# Altium PCB PCB.PcbDoc
Units mm, origin at the board's own origin, x right, y up, seen from the top; angles counter-clockwise.
Board outline 39.5 x 58 mm, 2 copper layers (Top Layer, Bottom Layer); 27 components, 30 nets, 127 pads, 7 vias.
Unrouted connection lines stored in the file: 7.
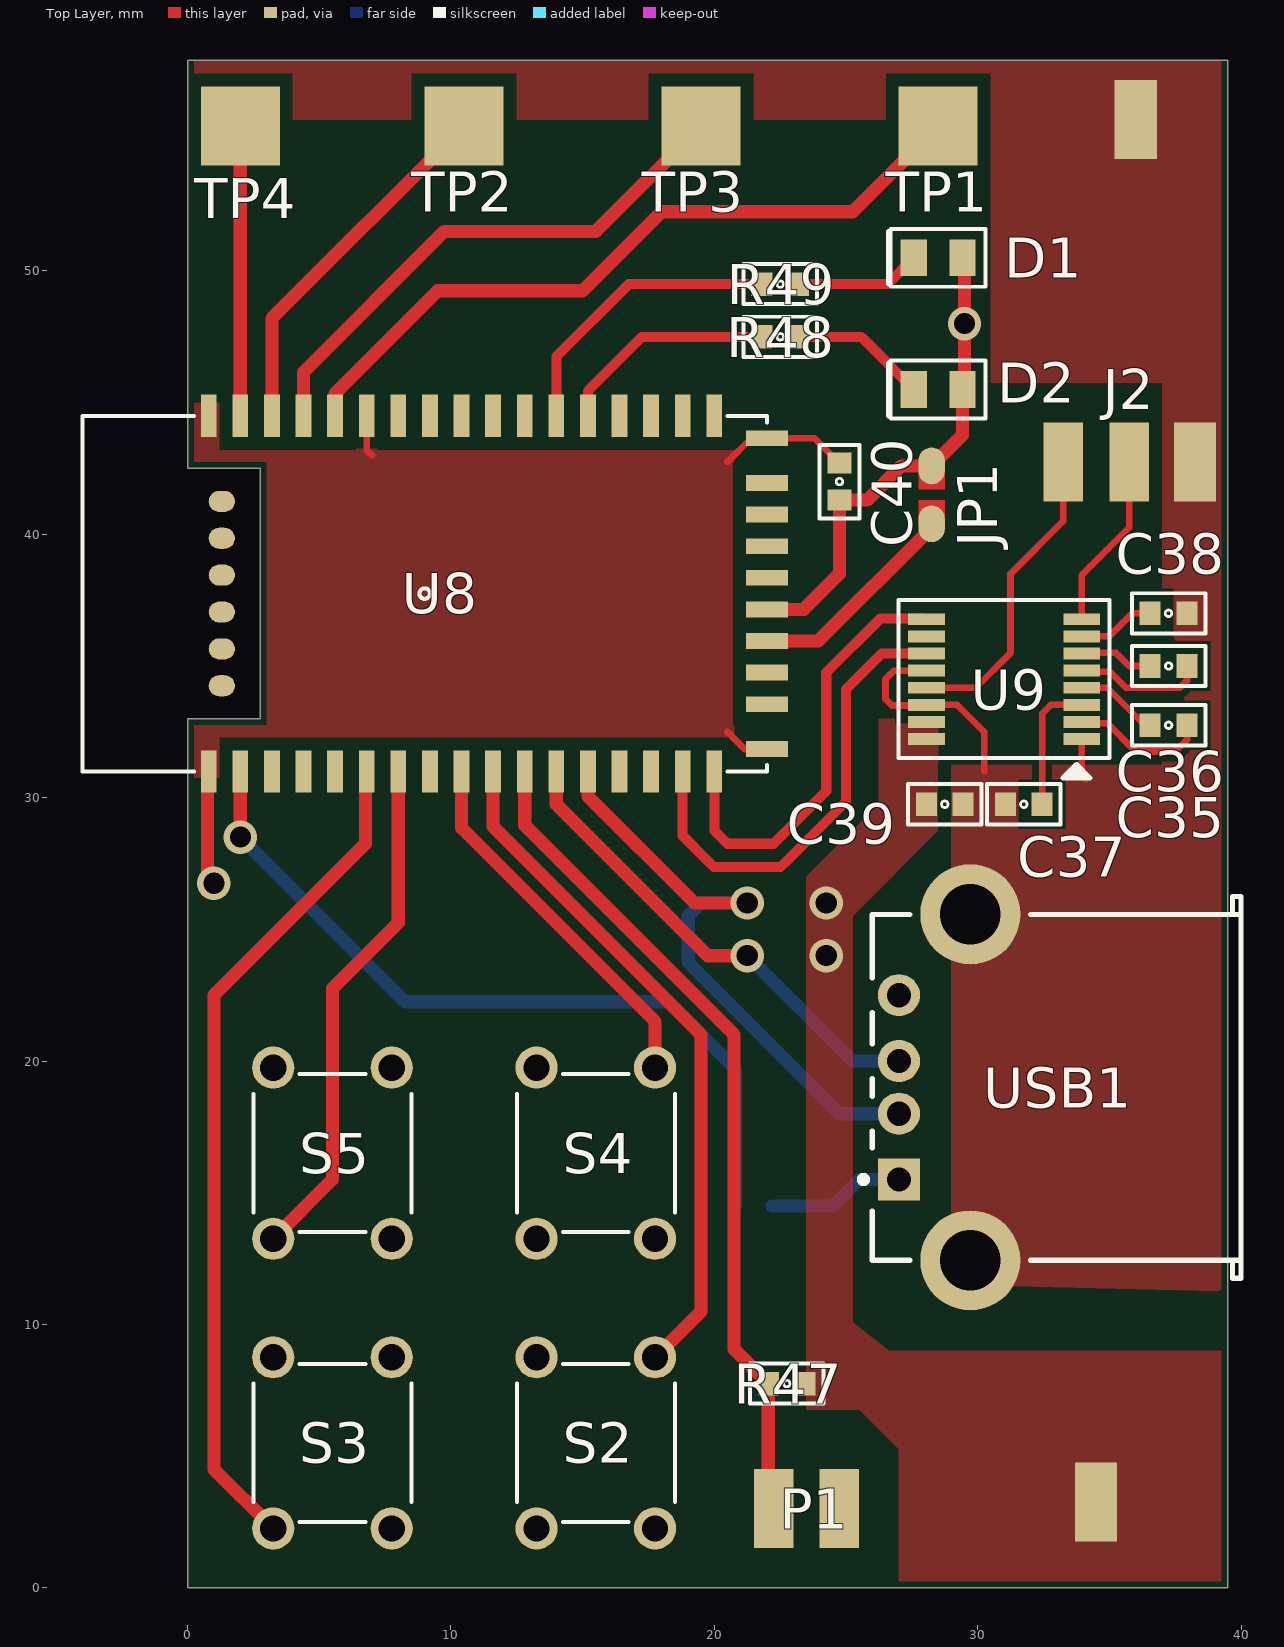
[diagram p0: Top Layer view]
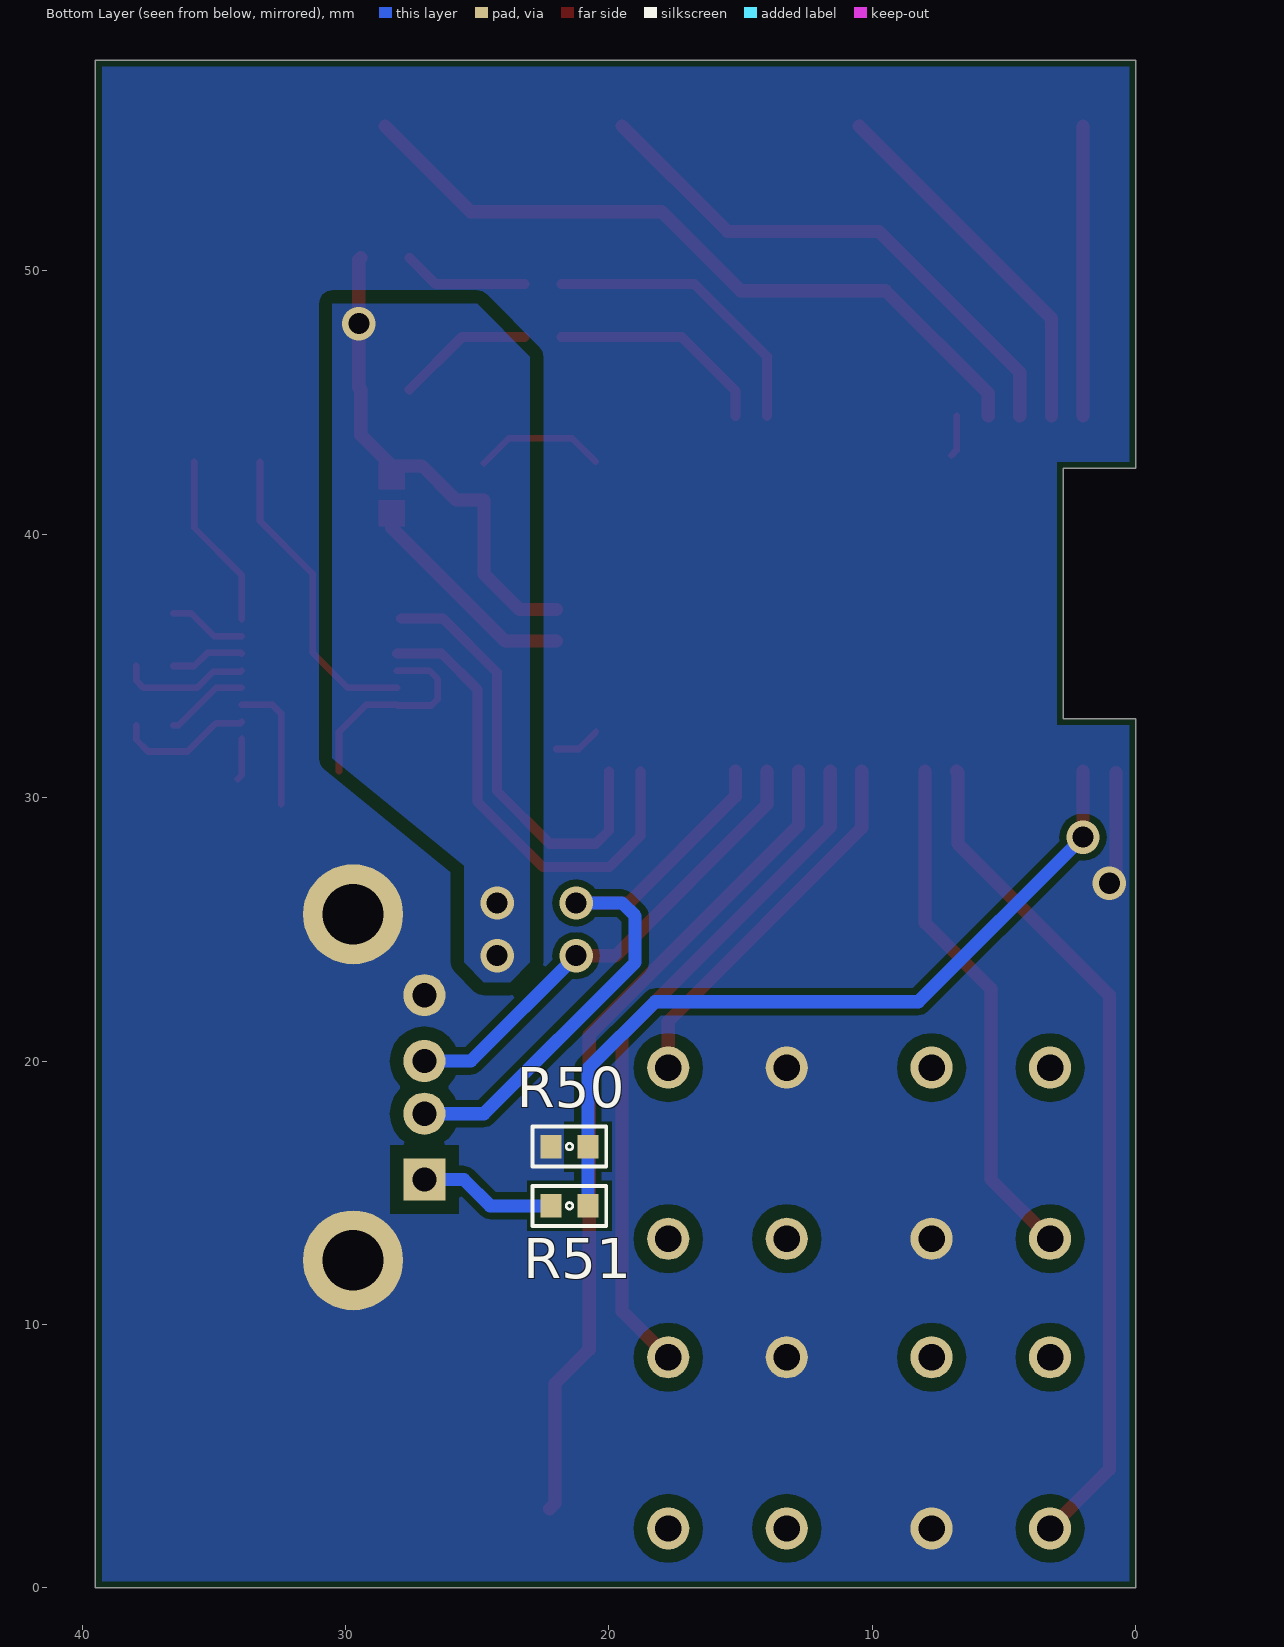
[diagram p1: Bottom Layer view, seen from below]

## Layer stack, top to bottom
Top Solder: solder mask 0.0102, Solder Resist, Dk 3.5
Top Layer: signal copper 0.0356
Dielectric 1: dielectric 0.32, FR-4, Dk 4.8
Bottom Layer: signal copper 0.0356
Bottom Solder: solder mask 0.0102, Solder Resist, Dk 3.5

## Board outline
0,0 0,33 2.75,33 2.75,42.5 0,42.5 0,58 39.5,58 39.5,0

## Design rules (kind name [scope] priority, off if disabled: settings)
Clearance [All] p1: gap=0.254 except(0.5: SMDPad-Poly THPad-Poly Poly-Poly)
DiffPairsRouting [All] p1: maxlimit=0.254 minlimit=0.254 mostfreqgap=0.254 toplayer_minwidth=0.381 toplayer_maxwidth=1 toplayer_prefwidth=0.5 bottomlayer_minwidth=0.381 bottomlayer_maxwidth=1 bottomlayer_prefwidth=0.5 maxuncoupledlength=12.7
PasteMaskExpansion [All] p1: expansion=-0.05
PlaneConnect [All] p1: planeconnectstyle=Direct reliefexpansion=0.508 reliefentries=4 reliefconductorwidth=0.254 reliefairgap=0.254
PolygonConnect [All] p1: connectstyle=Direct reliefconductorwidth=0.254 reliefentries=4 polygonreliefangle="90 Angle" airgapwidth=0.254
RoutingVias [All] p1: holewidth=0.711 width=1.27 viastyle="Through Hole" minholewidth=0.711 minwidth=1.27 maxholewidth=0.711 maxwidth=1.27
SolderMaskExpansion [All] p1: expansion=0.1
Width [All] p1: maxlimit=1 minlimit=0.254 preferedwidth=0.5 minimp=50.000000 maximp=50.000000 favimp=50.000000
27 further rules are at their usual default settings.

## Classes and differential pairs
differential pair D: +D_P -D_N
differential pair BT: +BT_P -BT_N
differential pair R: +R_P -R_N
differential pair L: +L_P -L_N

## Components (designator, comment, footprint, x,y, rotation, side; value= is the part's Value field where it differs from the comment)
C35 "0.1u" 1608[0603] 37.25,32.75 r0 top
C36 "0.1u" 1608[0603] 37.25,35 r0 top
C37 "0.1u" 1608[0603] 31.75,29.75 r0 top
C38 "0.1u" 1608[0603] 37.25,37 r180 top
C39 "0.1u" 1608[0603] 28.75,29.75 r0 top
C40 "0.1u" 1608[0603] 24.75,42 r90 top
D1 "LED2" LED_2012_DIOC2012X08N 28.5,50.5 r0 top
D2 "LED2" LED_2012_DIOC2012X08N 28.5,45.5 r0 top
J2 "HEADER" "3X 2.5MM PITCH PAD" 35.75,42.75 r0 top
JP1 "JP4" JUMP_PAD 28.25,41.5 r270 top
P1 "Header 2" "2X 2.5MM PITCH PAD" 23.5,3 r0 top
R47 "10K" 1608[0603] 22.75,7.75 r0 top
R48 "330" 1608[0603] 22.5,47.5 r0 top
R49 "220" 1608[0603] 22.5,49.5 r0 top
R50 "47K" 1608[0603] 21.5,16.75 r180 bottom
R51 "22K" 1608[0603] 21.5,14.5 r180 bottom
S2 "SW-PB" TACT_SW 15.5,5.5 r90 top
S3 "SW-PB" TACT_SW 5.5,5.5 r270 top
S4 "SW-PB" TACT_SW 15.5,16.5 r90 top
S5 "SW-PB" TACT_SW 5.5,16.5 r270 top
TP1 "R-" PAD1 28.5,55.5 r90 top
TP2 "R+" PAD1 10.5,55.5 r90 top
TP3 "L-" PAD1 19.5,55.5 r90 top
TP4 "L+" PAD1 2,55.5 r90 top
U8 "RN52" RN-52 22,31 r90 top
U9 "ICL3221EIVZ" 16_TSSOP_TSOP65P640X110-16N 31,34.5 r180 top
USB1 "USB002" USB2.5-2H4C 40,19 r0 top

## Footprints (in the part's own frame and the unit in brackets; to place one, negate y for a bottom-side part, rotate by r counter-clockwise, add the part's x,y. Pads: shape width x height; smd on the part's side, far side on the other; paste and mask are expansions set on the pad)
"2X 2.5MM PITCH PAD" [mm] "2P"
  rect 1.5x3 smd paste-0.05 mask+0.102: 1(-1.25,0) 2(1.25,0)
"3X 2.5MM PITCH PAD" [mm] "3P"
  rect 1.5x3 smd paste-0.05 mask+0.102: 1(-2.5,0) 2(0,0)
  rect 1.6x3 smd paste-0.05 mask+0.102: 3(2.5,0)
16_TSSOP_TSOP65P640X110-16N [mm] "TSOP, 16-Leads, Body 5.00x4.40mm, Pitch 0.65mm, IPC Medium Density"
  rect 1.4x0.45 smd: 1(-2.95,2.275) 2(-2.95,1.625) 3(-2.95,0.975) 4(-2.95,0.325) 5(-2.95,-0.325) 6(-2.95,-0.975) 7(-2.95,-1.625) 8(-2.95,-2.275) 9(2.95,-2.275) 10(2.95,-1.625) 11(2.95,-0.975) 12(2.95,-0.325) 13(2.95,0.325) 14(2.95,0.975) 15(2.95,1.625) 16(2.95,2.275)
  silkscreen extent -4,-3 4,3.75, body extent -3.18,-2.55 3.18,2.55, height 1.1
1608[0603] [mm] "Chip Capacitor, Body 1.6x0.8mm, IPC High Density"
  rect 0.8x0.9 smd: 1(-0.7,0) 2(0.7,0)
  silkscreen extent -1.4,-0.76 1.4,0.76, body extent -0.87,-0.48 0.87,0.48, height 1.3
JUMP_PAD [mm]
  oval 1.4x1 smd: 1(1.1,0) 2(-1.1,0)
  Top Layer region: 0.2,-0.5 1.2,-0.5 1.2,0.5 0.2,0.5
  Top Layer region: -1.2,-0.5 -0.2,-0.5 -0.2,0.5 -1.2,0.5
LED_2012_DIOC2012X08N [mm] "Chip Diode, 2-Leads, Body 2.00x1.25mm, IPC Medium Density"
  rect 1x1.4 smd: 1(0.925,0) 2(-0.925,0)
  silkscreen extent -1.9,-1.1 1.8,1.1, body extent -1,-0.63 1,0.63, height 0.8
PAD1 [mm]
  rect 3x3 smd: 1(0,0)
RN-52 [mm]
  rect 1.6x0.6 smd paste-0.05 mask+0.1: 1(0,21.2) 2(0,20) 3(0,18.8) 4(0,17.6) 5(0,16.4) 6(0,15.2) 7(0,14) 8(0,12.8) 9(0,11.6) 10(0,10.4) 11(0,9.2) 12(0,8) 13(0,6.8) 14(0,5.6) 15(0,4.4) 16(0,3.2) 17(0,2) 28(13.5,2) 29(13.5,3.2) 30(13.5,4.4) 31(13.5,5.6) 32(13.5,6.8) 33(13.5,8) 34(13.5,9.2) 35(13.5,10.4) 36(13.5,11.6) 37(13.5,12.8) 38(13.5,14) 39(13.5,15.2) 40(13.5,16.4) 41(13.5,17.6) 42(13.5,18.8) 43(13.5,20) 44(13.5,21.2)
  rect 0.6x1.6 smd paste-0.05 mask+0.1: 18(0.85,0) 19(2.55,0) 20(3.75,0) 21(4.95,0) 22(6.15,0) 23(7.35,0) 24(8.55,0) 25(9.75,0) 26(10.95,0) 27(12.65,0)
  oval 0.8x1 smd paste-0.05 mask+0.1: 45(10.25,20.7) 46(8.85,20.7) 47(7.45,20.7) 48(6.05,20.7) 49(4.65,20.7) 50(3.25,20.7)
  silkscreen extent 0,0 13.5,26
TACT_SW [mm]
  round 1.6 hole 1: 1(3.25,2.25) 2(3.25,-2.25) ""(-3.25,-2.25) ""(-3.25,2.25)
  silkscreen extent -3,-3 3,3
USB2.5-2H4C [mm] "Connector; USB1.1, Type A, Thru-Hole; 4 Position; Right Angle"
  rect 1.6x1.6 hole 0.92: 1(-12.99,-3.5)
  round 1.6 hole 0.92: 2(-12.99,-1) 3(-12.99,1) 4(-12.99,3.5)
  round 3.8 hole 2.3: 5(-10.28,6.57) 6(-10.28,-6.57)
  silkscreen extent -14.46,-7.25 0,7.25, body extent -14,-7.25 0,7.25, height 7.01

## Part data
C35 C36 C37 C38 C39 C40: library part "Cap Semi", "Capacitor (Semiconductor SIM Model)"
D1 D2: "Typical RED, GREEN, YELLOW, AMBER GaAs LED"
J2: library part "Header 3", "Header, 3-Pin"
P1: "Header, 2-Pin"
R47 R50 R51: library part "Res Semi", "Semiconductor Resistor"
R48 R49: library part Res1, "Resistor"
S2 S3 S4 S5: "Switch"
TP1 TP2 TP3 TP4: library part RAUND1
U9: library part TRS3221E

## Free pads (board coordinates)
  rect 1.6x3 smd paste-0.05 mask+0.102: 2(34.5,3.25) 3(36,55.75)

## Via types
v1: diameter 1.27, hole 0.8, Top Layer to Bottom Layer, 7 vias

## Nets (pads, with @x,y where several pads share a name; then routed paths per layer and width w, separated by ;. In a path a pad name is that pad's centre, name@x,y a point inside that pad or via, vN(x,y) a via of type N, cw(c..) or ccw(c..) an arc to the next point about the centre after c; other vN are vias at no path point)
3V3: C39.1 C40.1 D1.1 D2.1 JP1.2 pad.2 R47.2 U8.22 U9.15 U9.16 | length 18.6
  Top Layer w0.5: U8.22 23.4,37.15 24.75,38.5 C40.1 25.8,41.3 27.1,42.6 JP1.2 29.425,43.775 D2.1 29.5,45.575 v1(29.5,48) 29.5,50.425 D1.1
  other v1: 24.25,24 24.25,26
BT_N: U8.17 U9.9 | length 16.5
  Top Layer w0.381: U8.17 20,28.75 20.5,28.25 22.25,28.25 24.25,30.25 24.25,34.75 26.296,36.796 U9.9@27.905,36.796
BT_P: U8.16 U9.11 | length 18
  Top Layer w0.381: U8.16 18.8,28.552 19.801,27.551 19.987,27.365 22.513,27.365 22.699,27.551 24.699,29.551 25,29.852 25,34.115 26.36,35.475 U9.11
"BTN NXT": S5.2 U8.7 | length 19.7
  Top Layer w0.5: S5.2 5.5,15.5 5.5,22.75 8,25.25 U8.7
"BTN PRV": S4.2 U8.9 | length 14.3
  Top Layer w0.5: U8.9 10.4,28.85 17.75,21.5 S4.2
D_N: U8.13 USB1.2 | length 23.3
  Top Layer w0.5: U8.13 15.2,30.05 19.25,26 v1(21.25,26)
  Bottom Layer w0.5: v1(21.25,26) 19.5,26 19.01,25.51 19.01,23.74 24.75,18 USB1.2
D_P: U8.12 USB1.3 | length 18.3
  Top Layer w0.5: U8.12 14,29.75 19.75,24 v1(21.25,24)
  Bottom Layer w0.5: v1(21.25,24) 25.25,20 USB1.3
GND: C37.1 C38.1 C39.2 C40.2 J2.3 P1.2 pad.3 R50.1 S2.1 S3.1 S4.1 S5.1 U8.1 U8.18 U8.27 U8.39 U8.44 U8.45 U8.46 U8.47 U8.48 U8.49 U8.50 U9.1 U9.12 U9.14 USB1.4 USB1.5 USB1.6 | length 22.5
  Top Layer w0.254: U8.39 6.8,43.2 7,43 ; 20.5,32.5 21.15,31.85 U8.18 ; 20.5,42.75 21.4,43.65 U8.27 23.8,43.65 C40.2 ; U9.12 26.825,34.825 26.5,34.5 26.5,33.75 26.75,33.5 28.025,33.5 U9.14 29.225,33.525 30.25,32.5 30.25,31 ; U9.1 33.95,30.85 34.1,30.7
  Top Layer w0.5: U8.1@0.75,30.95 0.75,27 v1(1,26.75)
L_N: TP3.1 U8.41 | length 20.6
  Top Layer w0.5: U8.41 4.4,46.15 9.75,51.5 15.5,51.5 TP3.1
L_P: TP4.1 U8.43 | length 11
  Top Layer w0.5: U8.43 2,53.25 TP4.1
NetC35_1: C35.1 U9.4 | length 3.2
  Top Layer w0.254: U9.4 34.919,34.175 36.344,32.75 C35.1
NetC35_2: C35.2 U9.2 | length 5.2
  Top Layer w0.254: U9.2 33.994,32.831 34.919,32.831 36,31.75 37.5,31.75 37.95,32.2 C35.2
NetC36_1: C36.1 U9.6 | length 2.8
  Top Layer w0.254: U9.6 33.975,35.5 35.25,35.5 35.75,35 C36.1
NetC36_2: C36.2 U9.5 | length 4.9
  Top Layer w0.254: U9.5 33.994,34.781 35.031,34.781 35.643,34.169 37.669,34.169 37.95,34.45 C36.2
NetC37_2: C37.2 U9.3 | length 5.1
  Top Layer w0.254: C37.2 32.45,33.2 32.775,33.525 U9.3
NetC38_2: C38.2 U9.7 | length 3
  Top Layer w0.254: U9.7 34.987,36.125 35.862,37 C38.2
NetD1_2: D1.2 R49.2 | length 4.8
  Top Layer w0.381: R49.2 26.575,49.5 D1.2
NetD2_2: D2.2 R48.2 | length 5.2
  Top Layer w0.381: R48.2 25.575,47.5 D2.2
NetJ2_1: J2.1 U9.13 | length 11.8
  Top Layer w0.254: U9.13 29.925,34.175 31.25,35.5 31.25,38.5 33.25,40.5 J2.1
NetJ2_2: J2.2 U9.8 | length 6.7
  Top Layer w0.254: U9.8 33.95,38.45 35.75,40.25 J2.2
NetJP1_1: JP1.1 U8.21 | length 8.4
  Top Layer w0.5: U8.21 23.95,35.95 28.25,40.25 JP1.1@28.25,40.6
NetP1_1: P1.1 R47.1 U8.11 | length 31.9
  Top Layer w0.5: U8.11 12.8,28.95 20.75,21 20.75,9.05 R47.1 22.05,3.2 P1.1
NetR48_1: R48.1 U8.32 | length 8.4
  Top Layer w0.381: U8.32 15.2,45.45 17.25,47.5 R48.1
NetR49_1: R49.1 U8.33 | length 11.2
  Top Layer w0.381: U8.33 14,46.75 16.75,49.5 R49.1
NetR50_2: R50.2 R51.2 U8.2 | length 30.1
  Top Layer w0.5: v1(2,28.5) U8.2
  Bottom Layer w0.5: v1(2,28.5) 8.25,22.25 18.25,22.25 20.8,19.7 R50.2 R51.2
NetR51_1: R51.1 USB1.1 | length 5.2
  Bottom Layer w0.5: R51.1 24.51,14.5 25.51,15.5 USB1.1
R_N: TP1.1 U8.40 | length 28
  Top Layer w0.5: U8.40 5.6,45.35 9.5,49.25 15,49.25 18,52.25 25.25,52.25 TP1.1
R_P: TP2.1 U8.42 | length 14
  Top Layer w0.5: U8.42 3.2,48.2 TP2.1
"VOL DN": S2.2 U8.10 | length 26.2
  Top Layer w0.5: U8.10 11.6,28.9 19.5,21 19.5,10.5 S2.2
"VOL UP": S3.2 U8.6 | length 32.1
  Top Layer w0.5: S3.2 1,4.5 1,22.5 6.75,28.25 6.75,30.95 U8.6
pads on no net: S2. S3. S4. S5. U8.3 U8.4 U8.5 U8.8 U8.14 U8.15 U8.19 U8.20 U8.23 U8.24 U8.25 U8.26 U8.28 U8.29 U8.30 U8.31 U8.34 U8.35 U8.36 U8.37 U8.38 U9.10

## Polygon pours and split planes (outlines as drawn)
GND on Top Layer "GND_L01_P008" (solid, remove dead copper, pour order 8): 0.25,30.75 0.25,32.75 3,32.75 3,34 3,42.75 0.25,42.75 0.25,45 1.25,45 1.25,43.25 16,43.25 20.75,43.25 20.75,37.5 20.75,32.25 1.25,32.25 1.25,30.75
GND on Top Layer "GND_L01_P004" (solid, remove dead copper, pour order 4): 39.246,58 0.246,58 0.246,55.75 30.5,55.75 30.5,45.75 37,45.75 37,31.25 29,31.25 29,21 29,11.5 39.246,11.25 39.246,55.75
3V3 on Top Layer "3V3_L01_P000" (solid, remove dead copper, pour order 0): 39.25,0.25 27,0.25 27,5.25 26.5,5.75 25.5,6.75 24.5,6.75 23.5,6.75 23.5,27 26.25,29.75 26.25,33 28.5,33 28.5,28.75 25.25,25.5 25.25,14.5 25.25,10.083 26.643,9 39.25,9
GND on Bottom Layer "GND_L02_P006" (solid, remove dead copper, pour order 6): 39.25,57.75 0.25,57.75 0.25,42.75 3,42.75 3,32.75 0.25,32.75 0.25,0.25 39.25,0.25
3V3 on Bottom Layer "3V3_L02_P002" (solid, remove dead copper, pour order 2): 25.5,23.75 24.75,23 23.75,23 23,23.75 23,46.75 25,48.75 30.5,48.75 30.5,31.5 25.5,27.409

## Silkscreen, mask and mechanical layers (free items; w line width, h text height)
Mechanical 1:
  the board outline again, w0.15

## Dimensions
39.5,0 to 39.5,58 on Mechanical 13